# Altium PCB PCB.PcbDoc
Units mm, origin at the board's own origin, x right, y up, seen from the top; angles counter-clockwise.
Board outline 54.8 x 26.13 mm, 2 copper layers (Top Layer, Bottom Layer); 70 components, 35 nets, 200 pads, 64 vias.
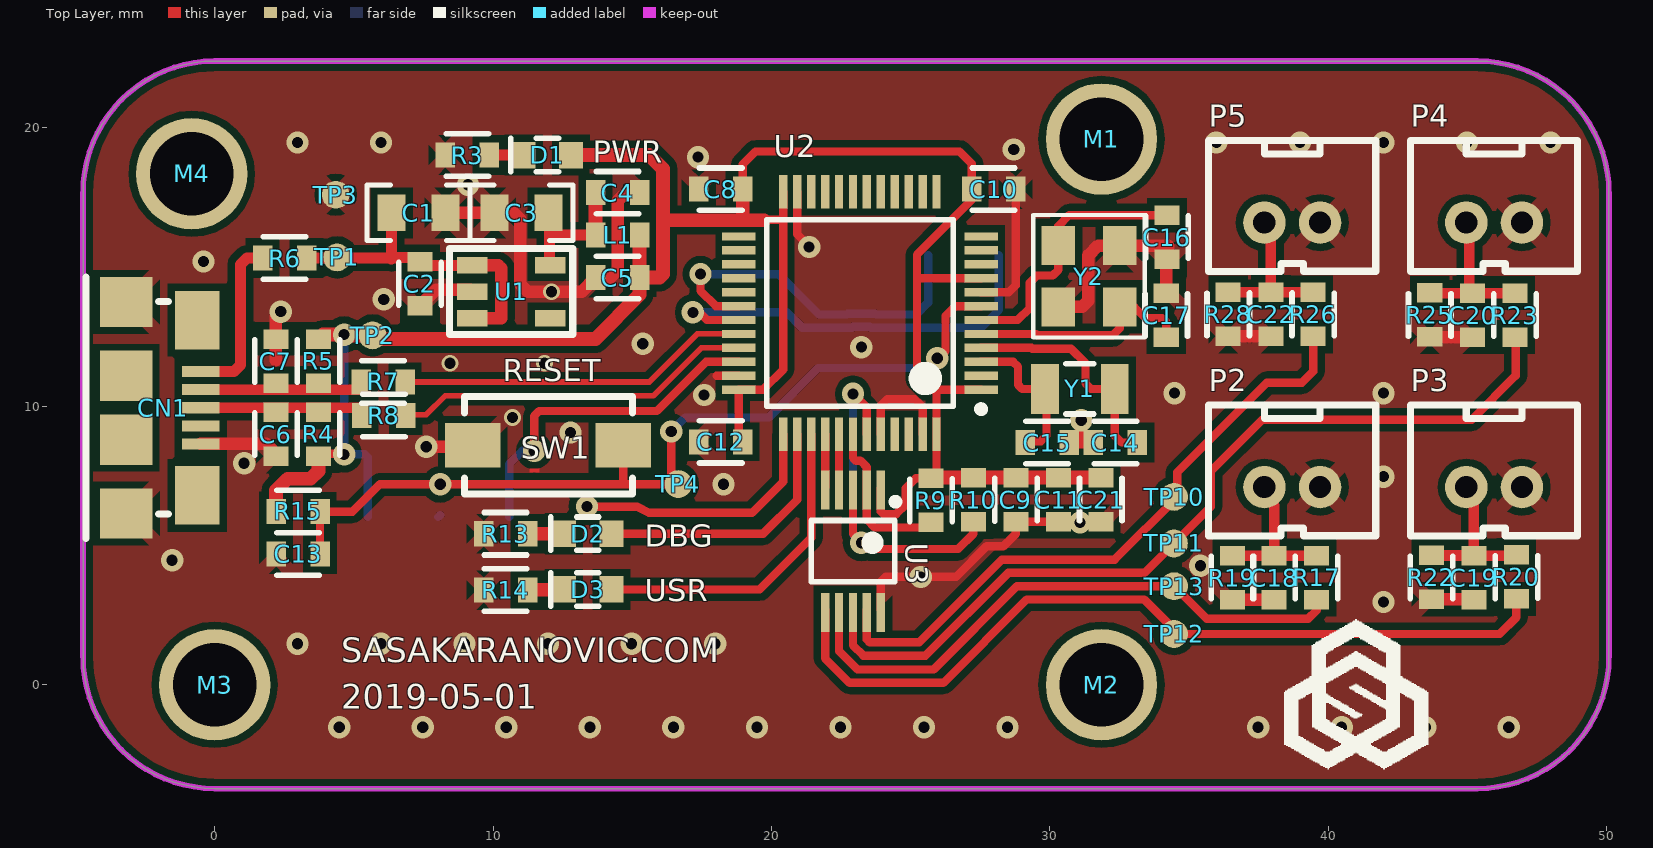
[diagram p0: Top Layer view]
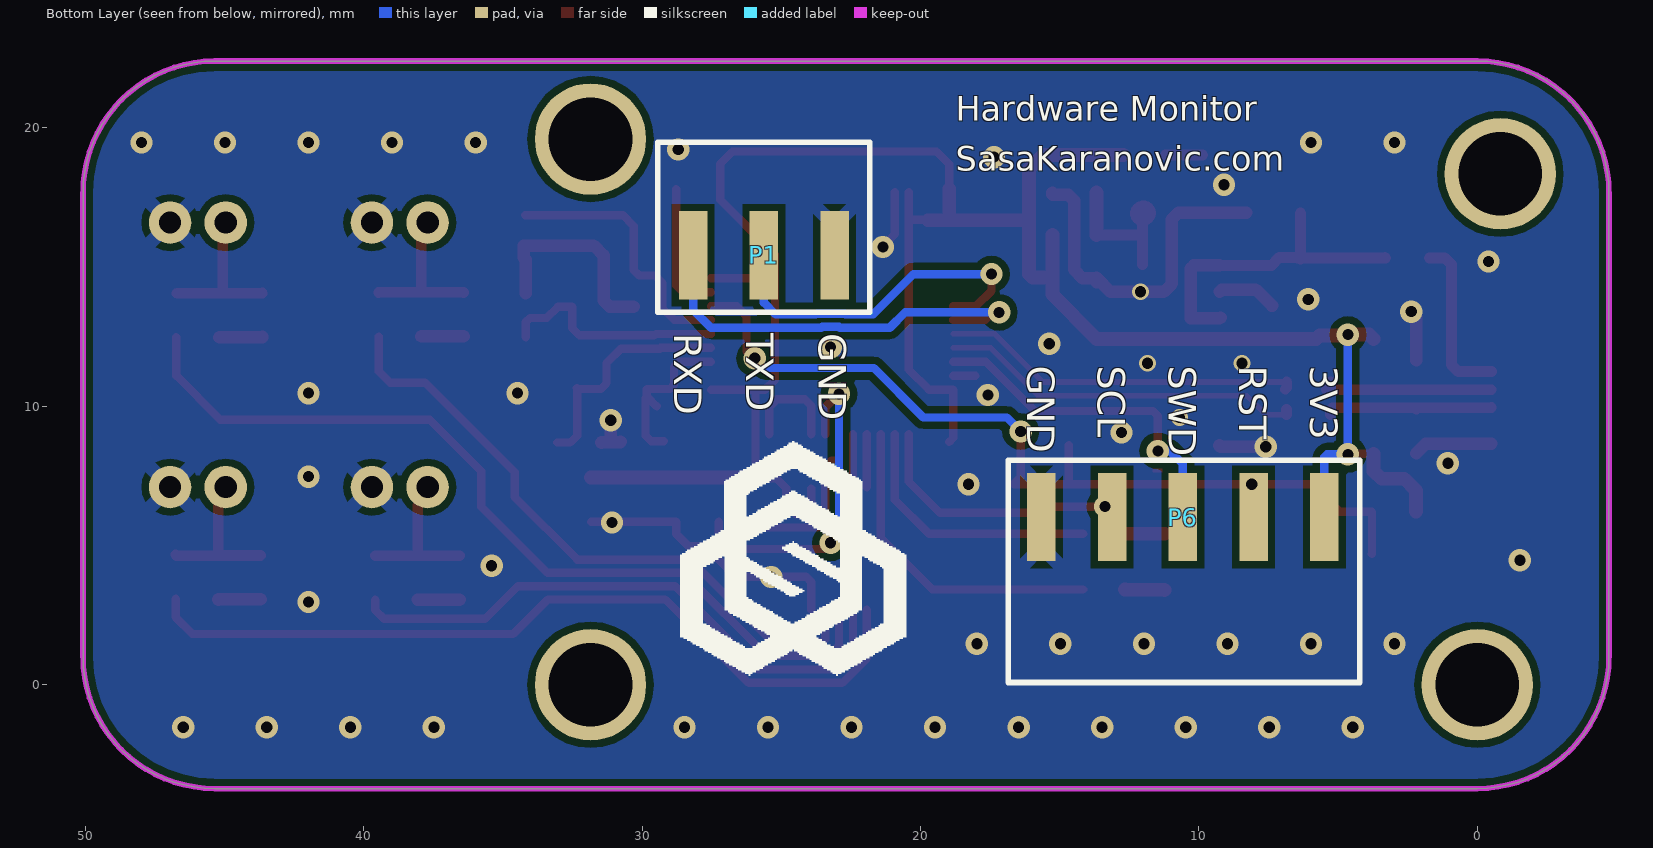
[diagram p1: Bottom Layer view, seen from below]
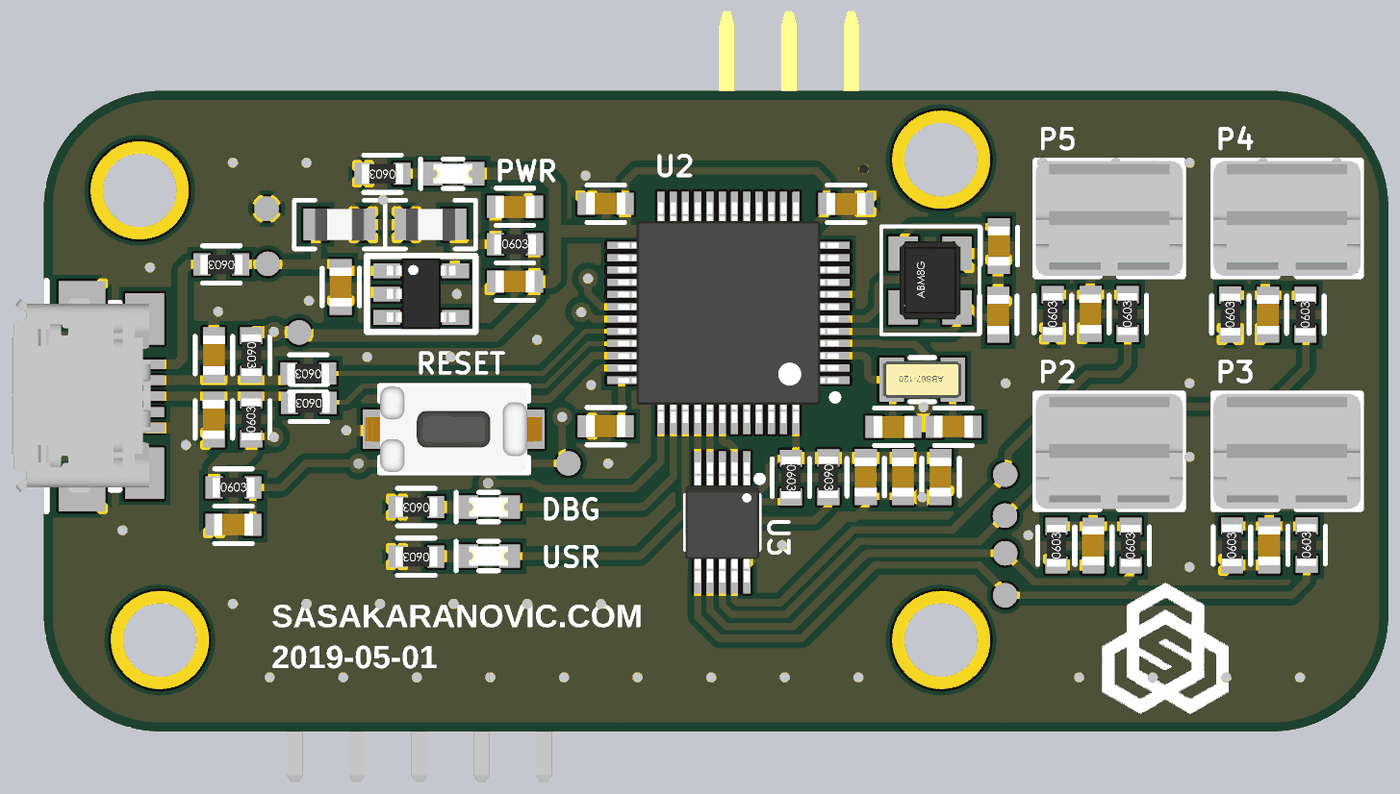
[diagram p2: 3D render of the assembled board from above, using the file's embedded part models]

## Layer stack, top to bottom
Top Solder: solder mask 0.0102, Solder Resist, Dk 3.5
Top Layer: signal copper 0.0356
Dielectric 1: dielectric 0.32, FR-4, Dk 4.8
Bottom Layer: signal copper 0.0356
Bottom Solder: solder mask 0.0102, Solder Resist, Dk 3.5

## Board outline
-4.727,1 -4.727,17.675 cw(c0,17.675) 0,22.402 45.348,22.402 cw(c45.348,17.675) 50.075,17.675 50.075,1 cw(c45.348,1) 45.348,-3.727 0,-3.727 cw(c0,1)

## Design rules (kind name [scope] priority, off if disabled: settings)
AssemblyTestPointUsage [All] p1 off:
AssemblyTestpoint [All] p1 off: testpointundercomponent=TRUE minsize=1.016 maxsize=2.54 preferedsize=1.524 minholesize=0 maxholesize=1.016 preferedholesize=0.813 testpointgrid=0.025 usegrid=TRUE gridtolerance=0 allowsidetop=TRUE allowsidebottom=TRUE
Clearance Clearance_3 [InNamedPolygon('Top GND')] p1: gap=0.254 ignorepadtopadclearanceinfootprint=FALSE except(0: Arc-Hole Track-Hole SMDPad-Hole THPad-Hole Via-Hole Fill-Hole Poly-Hole Region-Hole Text-Hole)
Clearance Clearance_2 [InNamedPolygon('Bottom GND')] p2: gap=0.254 ignorepadtopadclearanceinfootprint=FALSE except(0: Arc-Hole Track-Hole SMDPad-Hole THPad-Hole Via-Hole Fill-Hole Poly-Hole Region-Hole Text-Hole)
Clearance Clearance_1 [InNamedPolygon('TOP_GND')] p3: gap=0.508 ignorepadtopadclearanceinfootprint=FALSE
Clearance [All] p4: gap=0.178 ignorepadtopadclearanceinfootprint=FALSE
ComponentClearance [All] p1 off: gap=0.254 collisioncheckmode=3 verticalgap=0.254 showdistances=FALSE
DiffPairsRouting [All] p1: maxlimit=0.5 minlimit=0.254 mostfreqgap=0.3 toplayer_minwidth=0.2 toplayer_maxwidth=0.381 toplayer_prefwidth=0.3 bottomlayer_minwidth=0.2 bottomlayer_maxwidth=0.381 bottomlayer_prefwidth=0.3 maxuncoupledlength=12.7
FabricationTestPointUsage [All] p1 off: valid=0 allowmultiple=FALSE
FabricationTestpoint [All] p1 off: side=3 testpointundercomponent=TRUE minsize=1.016 maxsize=2.54 preferedsize=1.524 minholesize=0 maxholesize=1.016 preferedholesize=0.813 testpointgrid=0.025 allowsidetop=TRUE allowsidebottom=TRUE usegrid=TRUE gridtolerance=0
FanoutControl Fanout_BGA [IsBGA] p1 off: bgadir=Out bgaviamode=Centered fanoutstyle=Auto fanoutdirection=Alternating viagrid=0.025 // Fanout_BGA (Default Rule)
FanoutControl Fanout_LCC [IsLCC] p2 off: bgadir=Out bgaviamode=Centered fanoutstyle=Auto fanoutdirection=Alternating viagrid=0.025 // Fanout_LCC (Default Rule)
FanoutControl Fanout_SOIC [IsSOIC] p3 off: bgadir=Out bgaviamode=Centered fanoutstyle=Auto fanoutdirection=Alternating viagrid=0.025 // Fanout_SOIC (Default Rule)
FanoutControl Fanout_Small [(CompPinCount < 5)] p4 off: bgadir=Out bgaviamode=Centered fanoutstyle=Auto fanoutdirection=OutThenIn viagrid=0.025 // Fanout_Small (Default Rule)
FanoutControl Fanout_Default [All] p5 off: bgadir=Out bgaviamode=Centered fanoutstyle=Auto fanoutdirection=Alternating viagrid=0.025 // Fanout_Default (Default Rule)
Height [All] p1 off: minheight=0 maxheight=25.4 prefheight=12.7
HoleSize [All] p1: absolutevalues=TRUE maxlimit=6.3 minlimit=0.3 maxpercent=80.000 minpercent=20.000
MinimumSolderMaskSliver [All] p1 off: minsoldermaskwidth=0.254
NetAntennae [All] p1 off: netantennaetolerance=0
PasteMaskExpansion [All] p1 off: expansion=0
PlaneConnect [All] p1: planeconnectstyle=Direct reliefexpansion=0.508 reliefentries=4 reliefconductorwidth=0.254 reliefairgap=0.254
PolygonConnect [All] p1: thpad.connectstyle=Relief thpad.reliefconductorwidth=0.508 thpad.reliefentries=4 thpad.polygonreliefangle="45 Angle" thpad.airgapwidth=0.254 smdpad.connectstyle=Relief smdpad.reliefconductorwidth=0.508 smdpad.reliefentries=4 smdpad.polygonreliefangle="45 Angle" smdpad.airgapwidth=0.254 via.connectstyle=Direct via.reliefconductorwidth=0.508 via.reliefentries=4 via.polygonreliefangle="45 Angle" via.airgapwidth=0.254
RoutingVias [All] p1: holewidth=0.4 width=0.6 viastyle="Through Hole" minholewidth=0.4 minwidth=0.6 maxholewidth=10 maxwidth=10
SilkToSilkClearance [All] p1 off: silktosilkclearance=0.254
SilkToSolderMaskClearance [IsPad] p1 off: minsilkscreentomaskgap=0.254 clearancetoexposedcopper=TRUE
SolderMaskExpansion [All] p1 off: expansion=0.102
Width [All] p1: maxlimit=50 minlimit=0.2 preferedwidth=0.35
11 further rules are at their usual default settings.

## Classes and differential pairs
differential pair UIN: +UIN_P -UIN_N
differential pair USB: +USB_P -USB_N

## Components (designator, comment, footprint, x,y, rotation, side; value= is the part's Value field where it differs from the comment)
C1 "Cap" 0805 7.325,16.95 r180 top value=47uF
C2 "Cap" "0603 - CAP" 7.375,14.404 r90 top value=100n
C3 "Cap" 0805 11.025,16.95 r0 top value=47uF
C4 "Cap" "0603 - CAP" 14.475,17.675 r180 top value=100n
C5 "Cap" "0603 - CAP" 14.475,14.625 r0 top value=100n
C6 "Cap" "0603 - CAP" 2.2,9 r90 top value=DNP
C7 "Cap" "0603 - CAP" 2.2,11.625 r270 top value=DNP
C8 "Cap" "0603 - CAP" 18.175,17.8 r0 top value=100n
C9 "Cap" "0603 - CAP" 28.775,6.65 r90 top value=100n
C10 "Cap" "0603 - CAP" 27.975,17.8 r180 top value=100n
C11 "Cap" "0603 - CAP" 30.3,6.65 r90 top value=100n
C12 "Cap" "0603 - CAP" 18.175,8.725 r0 top value=100n
C13 "Cap" "0603 - CAP" 3,4.7 r0 top value=100n
C14 "Cap" "0603 - CAP" 32.35,8.7 r0 top value=1n
C15 "Cap" "0603 - CAP" 29.9,8.7 r180 top value=1n
C16 "Cap" "0603 - CAP" 34.2,16.075 r270 top value=1n
C17 "Cap" "0603 - CAP" 34.175,13.275 r90 top value=1n
C18 "Cap" "0603 - CAP" 38.05,3.85 r90 top value=1n
C19 "Cap" "0603 - CAP" 45.225,3.85 r90 top value=1n
C20 "Cap" "0603 - CAP" 45.175,13.275 r90 top value=1n
C21 "Cap" "0603 - CAP" 31.825,6.65 r90 top value=100n
C22 "Cap" "0603 - CAP" 37.935,13.307 r90 top value=1n
CN1 "USB Connector" "Amphenol FCI 10118192-0001LF" -3.175,9.95 r270 top
D1 "LED" "0603 DIODE" 11.95,19.025 r180 top
D2 "LED" "0603 DIODE" 13.4,5.425 r180 top
D3 "LED" "0603 DIODE" 13.4,3.425 r180 top
L1 "Inductor" 0603 14.475,16.15 r0 top value=220R@100MHz
M1 "Mounting Hole" "Mounting Hole" 31.85,19.6 r0 top
M2 "Mounting Hole" "Mounting Hole" 31.85,0 r0 top
M3 "Mounting Hole" "Mounting Hole" 0,0 r0 top
M4 "Mounting Hole" "Mounting Hole" -0.825,18.35 r0 top
P1 "USART DBG" "Header 3x1 SMD" 28.165,15.425 r180 bottom
P2 "440054-2" HEADER-2mm-2Pos 38.7,7.1 r0 top
P3 "440054-2" HEADER-2mm-2Pos 45.95,7.1 r0 top
P4 "440054-2" HEADER-2mm-2Pos 45.95,16.6 r0 top
P5 "440054-2" HEADER-2mm-2Pos 38.7,16.6 r0 top
P6 "SWD" "Header 5x1 SMD" 5.495,6.025 r0 bottom
R3 "Res" 0603 9.075,19.025 r180 top value=470R
R4 "Res" 0603 3.725,9 r90 top value=DNP
R5 "Res" 0603 3.725,11.625 r270 top value=DNP
R6 "Res" 0603 2.51,15.325 r180 top value=0R
R7 "Res" 0603 6.05,10.875 r180 top value=0R
R8 "Res" 0603 6.075,9.675 r180 top value=0R
R9 "Res" 0603 25.725,6.625 r270 top value=4K7
R10 "Res" 0603 27.25,6.64 r270 top value=4K7
R13 "Res" 0603 10.45,5.425 r180 top value=0R
R14 "Res" 0603 10.45,3.4 r180 top value=0R
R15 "Res" 0603 3,6.225 r0 top value=4K7
R17 "Res" 0603 39.575,3.85 r90 top value=1K
R19 "Res" 0603 36.55,3.85 r90 top value=100K
R20 "Res" 0603 46.75,3.875 r90 top value=1K
R22 "Res" 0603 43.7,3.86 r90 top value=100K
R23 "Res" 0603 46.7,13.275 r90 top value=1K
R25 "Res" 0603 43.638,13.282 r90 top value=100K
R26 "Res" 0603 39.45,13.3 r90 top value=1K
R28 "Res" 0603 36.4,13.3 r90 top value=100K
SW1 "Switch" EVQ-5PN04K 11.975,8.6 r180 top
TP1 "Test Point 0.6mm" TP_SMD_1mm 4.4,15.35 r90 top
TP2 "Test Point 0.6mm" TP_SMD_1mm 5.675,12.55 r90 top
TP3 "Test Point 0.6mm" TP_SMD_1mm 4.35,17.6 r90 top
TP4 "Test Point 0.6mm" TP_SMD_1mm 16.65,7.207 r180 top
TP10 "Test Point 0.6mm" TP_SMD_1mm 34.458,6.75 r180 top
TP11 "Test Point 0.6mm" TP_SMD_1mm 34.45,5.075 r180 top
TP12 "Test Point 0.6mm" TP_SMD_1mm 34.458,1.825 r180 top
TP13 "Test Point 0.6mm" TP_SMD_1mm 34.458,3.542 r180 top
U1 "AP2127K-3.3" SOT-23-5 10.65,14.125 r0 top
U2 "IC MCU 32BIT 64KB FLASH 48LQFP" LQFP48_7x7mm 23.175,13.35 r180 top
U3 "MCP4728" TSSOP50P490X110-10N 22.925,4.8 r270 top
Y1 "32.768Hz" ABS07-120 31.075,10.625 r180 top
Y2 "8MHz" ABM8G 31.4,14.675 r90 top

## Footprints (in the part's own frame and the unit in brackets; to place one, negate y for a bottom-side part, rotate by r counter-clockwise, add the part's x,y. Pads: shape width x height; smd on the part's side, far side on the other; paste and mask are expansions set on the pad)
0603 [mm]
  rect 0.7x0.9 smd: 1(-0.79,0) 2(0.79,0)
  silkscreen extent -0.76,-0.76 0.76,0.76, body extent -0.85,-0.4 0.85,0.4, height 0.56
"0603 - CAP" [mm]
  rect 0.7x0.9 smd: 1(-0.79,0) 2(0.79,0)
  silkscreen extent -0.76,-0.76 0.76,0.76, body extent -0.8,-0.44 0.8,0.46, height 0.8
"0603 DIODE" [mm] "0603 Package for Diode"
  rect 0.85x0.95 smd: A(-0.85,0) K(0.85,0)
  silkscreen extent -0.4,-0.6 1.32,0.6, body extent -0.8,-0.4 0.8,0.4, height 0.7
0805 [mm]
  rect 1x1.3 smd: 1(-0.97,0) 2(0.97,0)
  silkscreen extent -1.85,-0.99 1.85,0.99, body extent -1,-0.65 1,0.66, height 0.73
ABM8G [mm]
  rect 1.4x1.2 smd: 1(-1.1,-1.1) 2(1.1,-1.1) 3(1.1,1.1) 4(-1.1,1.1)
  silkscreen extent -2.2,-2 2.2,2, body extent -3.1,-1.25 1.6,1.25, height 7.01
ABS07-120 [mm] "0.126\" L x 0.061\" W (3.20mm x 1.50mm)"
  rect 1x1.8 smd: 1(-1.25,0) 2(1.25,0)
  silkscreen extent -0.5,-0.9 0.5,0.9, body extent -1.6,-0.75 1.6,0.75, height 0.89
"Amphenol FCI 10118192-0001LF" [mm]
  rect 0.4x1.35 smd: 1(-1.3,2.675) 2(-0.65,2.675) 3(0,2.675) 4(0.65,2.675) 5(1.3,2.675)
  rect 1.8x1.9 smd: 6(-3.8,0) 7(3.8,0) ""(-1.15,0) ""(1.15,0)
  rect 2.1x1.6 smd: ""(-3.15,2.55) ""(3.15,2.55)
  silkscreen extent -4.7,-1.45 4.7,1.52, body extent -3.98,-2.87 3.93,2.79, height 3.09
EVQ-5PN04K [mm]
  rect 2x1.6 smd: 1(-2.7,0) 2(2.7,0)
  silkscreen extent -3.03,-1.75 3,1.75, body extent -3.6,-1.75 3.6,1.75, height 5.1
"Header 3x1 SMD" [mm] "Connector; Header; 3 Position"
  rect 1.02x3.17 smd: 1(0,0) 2(2.54,0) 3(5.08,0)
  silkscreen extent -1.27,-2.04 6.35,4.06, body extent -1.3,-1.27 6.32,10.22
"Header 5x1 SMD" [mm] "Connector; Header; 5 Position"
  rect 1.02x3.17 smd: 1(0,0) 2(2.54,0) 3(5.08,0) 4(7.62,0) 5(10.16,0)
  silkscreen extent -1.27,-2.04 11.35,5.94, body extent -1.27,-1.4 11.43,11.84
HEADER-2mm-2Pos [mm] "CONN HEADER VERT 2POS 2MM"
  round 1.524 hole 0.8: 1(-1,0) 2(1,0)
  silkscreen extent -3,-1.75 3,2.95, body extent -3,-1.75 3,2.95, height 6.1
LQFP48_7x7mm [mm] "TSQFP, 48-Leads, Body 7.50x7.50mm, Pitch 0.50mm, IPC Medium Density"
  rect 1.2x0.3 smd: 1(-4.35,2.75) 2(-4.35,2.25) 3(-4.35,1.75) 4(-4.35,1.25) 5(-4.35,0.75) 6(-4.35,0.25) 7(-4.35,-0.25) 8(-4.35,-0.75) 9(-4.35,-1.25) 10(-4.35,-1.75) 11(-4.35,-2.25) 12(-4.35,-2.75) 25(4.35,-2.75) 26(4.35,-2.25) 27(4.35,-1.75) 28(4.35,-1.25) 29(4.35,-0.75) 30(4.35,-0.25) 31(4.35,0.25) 32(4.35,0.75) 33(4.35,1.25) 34(4.35,1.75) 35(4.35,2.25) 36(4.35,2.75)
  rect 0.3x1.2 smd: 13(-2.75,-4.35) 14(-2.25,-4.35) 15(-1.75,-4.35) 16(-1.25,-4.35) 17(-0.75,-4.35) 18(-0.25,-4.35) 19(0.25,-4.35) 20(0.75,-4.35) 21(1.25,-4.35) 22(1.75,-4.35) 23(2.25,-4.35) 24(2.75,-4.35) 37(2.75,4.35) 38(2.25,4.35) 39(1.75,4.35) 40(1.25,4.35) 41(0.75,4.35) 42(0.25,4.35) 43(-0.25,4.35) 44(-0.75,4.35) 45(-1.25,4.35) 46(-1.75,4.35) 47(-2.25,4.35) 48(-2.75,4.35)
  silkscreen extent -4.47,-3.35 3.35,3.57, body extent -4.5,-4.5 4.5,4.5, height 1.6
"Mounting Hole" [mm] "PCB Mounting Hole"
  round 4 hole 3: 0(0,0)
  Mechanical 13 keep-out circle w0.254: c0,0 r3
SOT-23-5 [mm]
  rect 1.1x0.6 smd: 1(-1.4,0.94) 2(-1.4,-0.01) 3(-1.4,-0.96) 4(1.4,-0.96) 5(1.4,0.94)
  silkscreen extent -2.21,-1.55 2.21,1.55, body extent -1.4,-1.45 1.4,1.45
TP_SMD_1mm [mm]
  round 1 smd: 1(0,0)
TSSOP50P490X110-10N [mm] "TSSOP, 10-Leads, Body 3.00x3.00mm, Pitch 0.50mm, IPC Medium Density"
  rect 1.4x0.3 smd: 1(-2.2,1) 2(-2.2,0.5) 3(-2.2,0) 4(-2.2,-0.5) 5(-2.2,-1) 6(2.2,-1) 7(2.2,-0.5) 8(2.2,0) 9(2.2,0.5) 10(2.2,1)
  silkscreen extent -1.9,-1.5 1.1,1.65, body extent -2.45,-1.5 2.45,1.5, height 1.1

## Part data
C1 C3: "CAP TANT POLY47UF 20% 16V 1210", Distributor Part Number=478-9595-1-ND, Manufacturer="AVX Corporation", Manufacturer Part Number=TCNT476M016R0200A, Distributor=DigiKey
C2 C4 C5 C6 C7 C13: "Capacitor", Distributor Part Number=478-5052-1-ND, Manufacturer="AVX Corporation", Manufacturer Part Number=06035C104KAT2A, Distributor=DigiKey
C8 C9 C10 C11 C12 C14 C15 C16 C17 C18 C19 C20 C21 C22: "Capacitor"
CN1: library part "Amphenol FCI 10118192-0001LF", "CONN USB MICRO B RECPT SMT R/A", Manufacturer="Amphenol FCI", Manufacturer PN=10118192-0001LF, ComponentLink1Description=Datasheet, ComponentLink1URL=http://cdn.amphenol-icc.com/media/wysiwyg/files/drawing/10118192.pdf, Distributor=DigiKey, Distributor PN=609-4613-1-ND
D1 D2 D3: "Typical RED GaAs LED", LatestRevisionDate=08-Jul-2005, LatestRevisionNote="Mech Layer 1 removed.", PackageDescription="LED; 2 Leads", PackageReference=LED-1, Published=8-Jun-2000, Publisher="Altium Limited"
L1: "FERRITE BEAD 220 OHM 0603 1LN", Distributor Part Number=490-5255-1-ND, Manufacturer="Murata Electronics North America", Manufacturer Part Number=BLM18KG221SN1D, Distributor=DigiKey
M1 M2 M3 M4: "Board Mounting Hole"
P1: library part "Header 3", "Header, 3-Pin", LatestRevisionDate=17-Jul-2002, LatestRevisionNote="Re-released for DXP Platform.", Publisher="Altium Limited"
P2 P3 P4 P5: "CONN HEADER VERT 2POS 2MM", Manufacturer="TE Connectivity AMP Connectors", Distributor=DigiKey, Manufacturer Part Number=440054-2, Parameter 3=A100034-ND
P6: library part "Header 5", "Header, 5-Pin", LatestRevisionDate=17-Jul-2002, LatestRevisionNote="Re-released for DXP Platform.", Publisher="Altium Limited"
R3 R4 R5 R6 R7 R8 R9 R10 R13 R14 R15: "Resistor", Distributor Part Number=311-0.0GRCT-ND, Manufacturer=Yageo, Manufacturer Part Number=RC0603JR-070RL, Distributor=DigiKey
R17 R19 R20 R22 R23 R25 R26 R28: "Resistor", LatestRevisionDate=17-Jul-2002, LatestRevisionNote="Re-released for DXP Platform.", PackageDescription="Axial Device, Thru-Hole; 2 Leads; 0.3 in Pin Spacing", PackageReference=AXIAL-0.3, Published=8-Jun-2000, Publisher="Altium Limited"
SW1: library part EVQ-5PN04K, "SWITCH TACTILE SPST-NO 0.05A 12V", Distributor Part Number=P13595SCT-ND, Manufacturer="Panasonic Electronic Components", Distributor=DigiKey, Manufacturer Part Number=EVQ-5PN04K
TP1 TP2 TP3 TP4 TP10 TP11 TP12 TP13: library part TP
U1: library part AP2127K-3.3TRG1, "IC REG LINEAR 3.3V 300MA SOT23-5", Distributor Part Number=AP2127K-3.3TRG1DICT-ND, Manufacturer="Diodes Incorporated", Distributor=DigiKey, Manufacturer Part Number=AP2127K-3.3TRG1
U2: library part STM32F103C8T6, Distributor Part Number=497-6063-ND, Manufacturer=STMicroelectronics, ComponentLink1Description="DigiKey URL", ComponentLink1URL=https://www.digikey.ca/product-detail/en/stmicroelectronics/STM32F103C8T6/497-6063-ND/1646338, ComponentLink2Description=Datasheet, ComponentLink2URL=http://www.st.com/content/ccc/resource/technical/document/datasheet/33/d4/6f/1d/df/0b/4c/6d/CD00161566.pdf/files/CD00161566.pdf/jcr:content/translations/en.CD00161566.pdf, Distributor=DigiKey, Manufacturer Part Number=STM32F103C8T6
U3: "IC DAC 12BIT W/I2C 10-MSOP", Distributor Part Number=MCP4728T-E/UNCT-ND, Manufacturer="Microchip Technology", Manufacturer Part Number=MCP4728T-E/UN, Distributor=DigiKey
Y1: library part ABS07-120-32.768KHZ-T, "CRYSTAL 32.7680KHZ 6PF SMD", Distributor Part Number=535-11937-1-ND, Manufacturer="Abracon LLC", Distributor=DigiKey, Manufacturer Part Number=ABS07-120-32.768KHZ-T
Y2: library part ABM8G, "CRYSTAL 16.0000MHZ 10PF SMD", Distributor Part Number=535-10907-1-ND, Manufacturer="Abracon LLC", Manufacturer Part Number=ABM8G-16.000MHZ-4Y-T3, ComponentLink1Description=DigiKey, ComponentLink1URL=https://www.digikey.ca/products/en?keywords=535-10907-1-ND, ComponentLink2Description=Datasheet, ComponentLink2URL=https://www.abracon.com/Resonators/ABM8G.pdf, Distributor=DigiKey

## Via types
v1: diameter 0.8, hole 0.4, Top Layer to Bottom Layer, tented both sides, 60 vias
v2: diameter 0.6, hole 0.4, Top Layer to Bottom Layer, tented both sides, 4 vias

## Nets (pads, with @x,y where several pads share a name; then routed paths per layer and width w, separated by ;. In a path a pad name is that pad's centre, name@x,y a point inside that pad or via, vN(x,y) a via of type N, cw(c..) or ccw(c..) an arc to the next point about the centre after c; other vN are vias at no path point)
3V3: C5.2 C8.2 C9.2 C10.2 C11.2 C12.2 C21.2 D1.A L1.2 P6.1 R4.1 R5.1 R9.1 R10.1 R15.1 TP2.1 U2.1 U2.9 U2.24 U2.36 U2.48 U3.1 | length 85.6
  Top Layer w0.3: R4.1@3.725,8.293 R4.1@3.743,8.293 ; R4.1@3.725,8.31 R4.1@3.743,8.293 ; v1(4.65,8.275) 4.632,8.293 R4.1@3.743,8.293 ; C12.2 18.825,8.865 U2.36 19.699,10.6 20.425,11.326 20.425,16.7 ; C8.2 18.965,18.69 19.425,19.15 26.75,19.15 27.185,18.715 C10.2 27.185,17.41 25.222,15.447 25.222,14.6 ; 19.722,16.684 19.738,16.7 20.425,16.7 ; U2.24 20.425,16.7 ; U3.1@23.925,7.05 U3.1 23.925,6.225 24.022,6.128 24.478,6.128 24.825,6.475 24.825,7.065 25.175,7.415 R9.1 25.75,7.44 25.925,7.615 U2.48 25.925,10.6 ; U2.1 25.925,10.6 ; U2.9 25.3,14.6 25.222,14.6 ; 25.222,14.6 25.222,10.953 25.575,10.6 25.925,10.6
  Top Layer w0.5: R15.1 2.21,6.985 2.625,7.4 3.45,7.4 3.725,7.675 R4.1 R4.1@3.725,8.293 ; R5.1 3.885,12.575 v1(4.65,12.575) 4.675,12.55 TP2.1 5.8,12.425 13.675,12.425 15.265,14.015 C5.2 ; D1.A@12.7,19.025 D1.A 15.6,19.025 16.1,18.525 16.1,16.7 ; L1.2 C5.2 ; C8.2 18.965,16.699 18.95,16.684 ; 19.722,16.684 18.95,16.684 ; R9.1@25.75,7.44 C9.2@28.8,7.44 ; C9.2 C21.2 ; C5.2 15.975,14.625 16.1,14.75 16.1,16.7 ; 16.1,16.7 16.116,16.684 18.95,16.684
  Bottom Layer w0.3: v1(4.65,12.575) v1(4.65,8.275) 5.4,8.275 5.495,8.18 P6.1
CHA: R17.1 TP13.1 U3.7 | length 21.1
  Top Layer w0.3: U3.7@22.425,2.7 22.425,1.211 23.086,0.55 25.825,0.55 28.817,3.542 TP13.1 35.625,2.375 39.275,2.375 39.575,2.675 R17.1
CHB: R20.1 TP12.1 U3.6 | length 29.6
  Top Layer w0.3: U3.6@21.925,2.7 21.925,0.95 22.803,0.072 26.172,0.072 29.164,3.064 33.386,3.064 34.625,1.825 46.15,1.825 46.75,2.425 R20.1
CHC: R23.1 TP11.1 U3.8 | length 31.5
  Top Layer w0.3: U3.8@22.925,2.7 22.925,1.418 23.296,1.047 25.529,1.047 28.502,4.019 33.394,4.019 TP11.1 35.775,6.4 35.775,7.675 37.625,9.525 45.15,9.525 46.725,11.1 R23.1@46.725,12.485
CHD: R26.1 TP10.1 U3.9 | length 22.9
  Top Layer w0.3: U3.9@23.425,2.7 23.425,1.625 23.525,1.525 25.3,1.525 28.272,4.497 32.322,4.497 34.575,6.75 34.575,7.635 37.79,10.85 39.05,10.85 39.45,11.25 R26.1
GND: C1.1 C2.1 C3.1 C4.1 C5.1 C6.1 C7.1 C8.1 C9.1 C10.1 C11.1 C12.1 C13.1 C14.1 C15.1 C16.2 C17.2 C18.1 C19.1 C20.1 C21.1 C22.1 CN1.5 CN1.6 CN1.7 P1.3 P2.2 P3.2 P4.2 P5.2 P6.5 R3.2 R13.2 R14.2 R19.1 R22.1 R25.1 R28.1 SW1.2 TP3.1 U1.2 U2.8 U2.23 U2.35 U2.44 U2.47 U3.10 Y2.2 Y2.4 | length 57.8
  Top Layer w0.3: 18.025,11.1 U2.35 ; U2.23 20.925,16.175 v1@21.362,15.738 ; U3.10@23.925,2.7 23.925,3.7 24.1,3.875 26.625,3.875 27.725,4.975 28.325,4.975 28.775,5.425 C9.1 C21.1 ; U2.44 23.925,10.025 24.15,10.25 25.154,10.25 25.425,9.979 U2.47 ; U2.8 28.525,14.1 28.765,14.34 C10.1
  Top Layer w0.45: CN1.5 1.86,8.65 C6.1@2.2,8.31 ; 2.2,11.65 C7.1 2.2,13.225 v1(2.375,13.4) ; C2.1 7.951,14.19 9.175,14.19 U1.2 ; v1(7.6,8.55) 9.225,8.55 SW1.2 ; C1.1 C3.1 10.75,16.95 10.975,16.725 10.975,14.4 11.26,14.115 v2(12.1,14.115) 13.175,14.115 C5.1 ; C5.1@13.66,14.45 13.685,14.475 C5.1 ; C4.1 15.265,17.625 15.24,17.6 14.7,17.6 14.475,17.375 14.475,14.9 14.175,14.6 13.71,14.6 C5.1 ; Y2.4 31.15,13.575 31.375,13.8 31.375,15.425 31.725,15.775 Y2.2 34.25,15.775 34.25,15.335 C16.2 34.175,15.26 C17.2 ; C15.1@30.765,8.725 30.777,8.712 31.1,8.712 ; v1(31.121,9.5) 31.121,8.734 31.1,8.712 ; C14.1@31.46,8.7 31.447,8.712 31.1,8.712 ; R28.1 36.403,12.513 37.932,12.513 C22.1 ; R19.1 C18.1 ; R25.1 43.641,12.488 45.172,12.488 C20.1 ; R22.1 43.705,3.065 45.22,3.065 C19.1
  other v1: 4.475,-1.525 7.475,-1.525 10.475,-1.525 13.475,-1.525 16.475,-1.525 19.475,-1.525 22.475,-1.525 25.475,-1.525 28.475,-1.525 37.475,-1.525 40.475,-1.525 43.475,-1.525 46.475,-1.525 2.975,1.475 5.975,1.475 8.975,1.475 11.975,1.475 14.975,1.475 17.975,1.475 41.975,2.975 25.363,3.875 35.4,4.275 -1.525,4.475 31.075,5.825 18.275,7.2 41.975,7.475 1.059,7.956 12.781,9.057 17.579,10.405 34.475,10.475 41.975,10.475 23.225,12.125 15.375,12.25 6.075,13.841 -0.401,15.2 21.35,15.725 9.1,17.959 17.357,18.95 28.7,19.225 2.975,19.475 5.975,19.475 35.975,19.475 38.975,19.475 41.975,19.475 44.975,19.475 47.975,19.475
  other v2: 10.7,9.6 8.45,11.55 11.85,11.55
I2C1_SCL: R9.2 U2.42 U3.2 | length 6
  Top Layer w0.3: U2.42 22.925,8.15 23.025,8.05 23.189,8.05 23.425,7.814 U3.2 ; U3.2@23.425,7.1 23.425,5.929 23.704,5.65 25.54,5.65 R9.2
I2C1_SDA: R10.2 U2.43 U3.3 | length 14
  Top Layer w0.3: U3.3@22.925,7.1 22.925,5.425 23.475,4.875 26.7,4.875 27.25,5.425 R10.2 ; v1(22.925,10.45) 23.425,9.95 U2.43
  Bottom Layer w0.3: v1(22.925,10.45) 22.925,5.4 v1(23.225,5.1)
LED_DEBUG: D2.A U2.38 | length 9.6
  Top Layer w0.3: D2.A@14.15,5.425 D2.A 19.7,5.425 20.925,6.65 U2.38
LED_USER: D3.A U2.39 | length 11.8
  Top Layer w0.3: D3.A@14.15,3.425 D3.A 19.575,3.425 21.425,5.275 U2.39
NetC3_2: C3.2 C4.2 L1.1 U1.5 | length 5.1
  Top Layer w0.4: U1.5@12.023,15.092 12.023,16.175 ; C3.2@12.023,16.922 12.023,16.175 ; L1.1 12.048,16.15 12.023,16.175
  Top Layer w0.5: L1.1 C4.2
  Top Layer w0.9: C3.2 C3.2@12.023,16.922
NetC14_2: C14.2 U2.4 Y1.1 | length 8.4
  Top Layer w0.3: U2.4 29.336,12.1 29.366,12.069 30.756,12.069 31.275,11.55 31.275,10.825 31.475,10.625 Y1.1 ; Y1.1@32.35,10.65 Y1.1 ; C14.2@33.04,8.7 32.575,8.7 32.325,8.95 Y1.1
NetC15_2: C15.2 U2.3 Y1.2 | length 6
  Top Layer w0.3: U2.3 28.675,11.6 28.85,11.425 28.85,10.775 29,10.625 Y1.2 Y1.2@29.825,10.35 ; C15.2@29.21,8.75 29.675,8.75 29.875,8.95 29.875,10.3 Y1.2@29.825,10.35 ; Y1.2@29.475,10 Y1.2@29.825,10.35
NetC16_1: C16.1 U2.6 Y2.3 | length 9.7
  Top Layer w0.3: U2.6 28.839,13.1 29.275,13.536 29.275,14.441 29.534,14.7 30.1,14.7 30.3,14.9 Y2.3 30.3,16.475 30.69,16.865 C16.1
NetC17_1: C17.1 U2.5 Y2.1 | length 8.3
  Top Layer w0.3: U2.5 29.511,12.6 29.564,12.547 32.247,12.547 32.5,12.8 Y2.1 33.025,13.575 33.425,13.175 34.025,13.175 34.175,13.025 C17.1
NetC18_2: C18.2 P2.1 R17.2 R19.2 | length 5.6
  Top Layer w0.381: R19.2 C18.2 ; P2.1 37.7,6.791 38.05,6.441 C18.2 ; R17.2 C18.2
NetC19_2: C19.2 P3.1 R20.2 R22.2 | length 5.6
  Top Layer w0.381: R22.2 43.705,4.645 45.22,4.645 C19.2 ; P3.1 44.95,6.791 45.225,6.516 C19.2 ; R20.2 46.725,4.64 C19.2
NetC20_2: C20.2 P4.1 R23.2 R25.2 | length 5.7
  Top Layer w0.381: R25.2 43.641,14.068 C20.2@45.119,14.068 ; P4.1 45.063,16.487 45.063,14.124 C20.2@45.119,14.068 ; R23.2 C20.2 45.122,14.065 C20.2@45.119,14.068
NetC22_2: C22.2 P5.1 R26.2 R28.2 | length 5.7
  Top Layer w0.381: R28.2 36.403,14.093 37.932,14.093 C22.2 ; P5.1 37.7,16.291 37.935,16.056 C22.2 ; R26.2 39.443,14.097 C22.2
NetCN1_1: CN1.1 R6.2 | length 6
  Top Layer w0.4: CN1.1 0.691,11.25 0.925,11.484 0.925,15.091 1.159,15.325 R6.2
NetD1_K: D1.K R3.1 | length 1.3
  Top Layer w0.4: R3.1 D1.K D1.K@11.2,19.025
NetD2_K: D2.K R13.1 | length 1.4
  Top Layer w0.5: R13.1 D2.K D2.K@12.65,5.425
NetD3_K: D3.K R14.1 | length 1.4
  Top Layer w0.5: R14.1 11.24,3.413 12.637,3.413 D3.K@12.65,3.425
nLDAC: U2.41 U3.4 | length 1.9
  Top Layer w0.3: U3.4@22.425,7.1 U2.41
nRST: C13.2 P6.2 R15.2 SW1.1 TP4.1 U2.7 | length 32
  Top Layer w0.3: C13.2 3.782,4.707 3.782,5.775 3.782,6.217 4.95,6.217 5.94,7.207 14.675,7.207 ; SW1.1 14.675,7.207 ; v1(16.4,9.1) 16.4,7.457 TP4.1 14.675,7.207 ; v1(25.95,11.725) 26,11.725 26.25,11.975 26.25,13.25 26.6,13.6 U2.7
  Bottom Layer w0.3: P6.2 P6.2@8.1,6.09 ; v1(16.4,9.1) 16.9,9.6 19.9,9.6 21.675,11.375 25.6,11.375 v1(25.95,11.725)
  other v1: 8.1,7.2
RDY/nBSY: U2.40 U3.5 | length 1.9
  Top Layer w0.3: U3.5@21.925,7.1 U2.40
SWCLK: P6.4 U2.37 | length 9.5
  Top Layer w0.3: v1(13.375,6.4) 15.175,6.4 15.6,6.175 19.3,6.175 20.425,7.3 U2.37
  Bottom Layer w0.3: P6.4@13.175,6.525 13.3,6.4 v1(13.375,6.4)
SWIO: P6.3 U2.34 | length 12.4
  Top Layer w0.3: v1(11.475,8.4) 11.475,9.65 11.656,9.831 15.879,9.831 17.648,11.6 U2.34
  Bottom Layer w0.3: P6.3 10.575,7.925 11.05,8.4 v1(11.475,8.4)
UIN_N: C7.2 CN1.2 R5.2 R7.2 | length 6.2
  Top Layer w0.381: CN1.2@-0.493,10.593 CN1.2 R7.2@5.425,10.6 ; R7.2@5.201,10.66 5.26,10.719 R7.2
UIN_P: C6.2 CN1.3 R4.2 R8.2 | length 5.9
  Top Layer w0.381: CN1.3@-0.493,9.958 CN1.3 1.315,9.95 C6.2@2.141,9.95 ; C6.2@2.171,9.919 C6.2@2.2,9.89 ; C6.2@2.2,9.95 R8.2@5.216,9.95 ; R8.2@5.216,9.89 5.275,9.831 R8.2@5.275,9.7
USART1_RX: P1.1 U2.31 | length 15.5
  Top Layer w0.3: v1(17.175,13.375) 17.175,13.55 17.2,13.575 17.675,13.1 U2.31
  Bottom Layer w0.3: v1(17.175,13.375) 20.55,13.375 21.103,12.822 22.893,12.822 22.924,12.853 23.526,12.853 23.557,12.822 27.522,12.822 28.165,13.465 P1.1
USART1_TX: P1.2 U2.30 | length 12.9
  Top Layer w0.3: v1(17.45,14.75) 17.45,14.15 18,13.6 U2.30
  Bottom Layer w0.3: v1(17.45,14.75) 20.25,14.75 21.7,13.3 22.695,13.3 22.726,13.331 23.724,13.331 23.755,13.3 25.2,13.3 25.625,13.725 P1.2
USB_N: R7.1 U2.32 | length 13
  Top Layer w0.2: R7.1 15.608,10.875 17.333,12.6 U2.32
  Top Layer w0.381: R7.1 6.84,10.676 R7.1@6.899,10.616
USB_P: R8.1 U2.33 | length 13.2
  Top Layer w0.2: R8.1@6.855,9.7 7.6,9.7 8.275,10.375 15.752,10.375 ; 15.752,10.377 17.475,12.1 U2.33
  Top Layer w0.381: R8.1@6.855,9.7 R8.1@6.855,9.9
VUSB: C1.2 C2.2 R6.1 TP1.1 U1.1 U1.3 | length 11.8
  Top Layer w0.4: R6.1@3.32,15.345 R6.1 6.35,15.325 6.45,15.325 ; C1.2 6.355,15.35 6.35,15.345 7.12,15.345 7.4,15.065 U1.1
  Top Layer w0.45: 6.35,15.325 6.35,15.345 ; U1.3@9.225,13.19 U1.3 10.29,13.165 10.29,14.96 10.185,15.065 U1.1
pads on no net: CN1. CN1.4 M1.0 M2.0 M3.0 M4.0 U1.4 U2.2 U2.10 U2.11 U2.12 U2.13 U2.14 U2.15 U2.16 U2.17 U2.18 U2.19 U2.20 U2.21 U2.22 U2.25 U2.26 U2.27 U2.28 U2.29 U2.45 U2.46

## Polygon pours and split planes (outlines as drawn)
GND on Bottom Layer "Bottom GND" (solid, remove dead copper, pour order 18): -4.727,1 -4.727,17.675 cw(c0,17.675) 0,22.402 45.348,22.402 cw(c45.348,17.675) 50.075,17.675 50.075,1 cw(c45.348,1) 45.348,-3.727 0,-3.727 cw(c0,1)
GND on Top Layer "Top GND" (solid, remove dead copper, pour order 17): -4.727,1 -4.727,17.675 cw(c0,17.675) 0,22.402 45.348,22.402 cw(c45.348,17.675) 50.075,17.675 50.075,1 cw(c45.348,1) 45.348,-3.727 0,-3.727 cw(c0,1)

## Keep-outs
Keep-Out Layer:
  the board outline again, w0.2

## Other copper
Top Layer:
  rectangle net GND: 11.304,7.628 11.675,7.763

## Silkscreen, mask and mechanical layers (free items; w line width, h text height)
Top Overlay:
  region: 305 vertices and 4 holes, not listed, extent 38.405,-3.026 43.577,2.346
  text "PWR" at 13.575,18.75 h0.8
  text "RESET" at 10.35,10.9 h0.8
  text "DBG" at 15.45,4.95 h0.8
  text "USR" at 15.45,3 h0.8
  text "SASAKARANOVIC.COM" at 4.55,0.525 h1.5
  text "2019-05-01" at 4.55,-1.15 h1.5
Bottom Overlay:
  region: 305 vertices and 4 holes, not listed, extent 20.512,0.325 28.622,8.749
  text "Hardware Monitor" at 18.725,19.975 h1.5
  text "SasaKaranovic.com" at 18.725,18.175 h1.5
  text "GND" at 23.65,12.625 h1 r90
  text "TXD" at 26.25,12.625 h1 r90
  text "RXD" at 28.85,12.625 h1 r90
  text "3V3" at 6.005,11.45 h1 r90
  text "RST" at 8.545,11.45 h1 r90
  text "SWD" at 11.085,11.45 h1 r90
  text "SCL" at 13.625,11.45 h1 r90
  text "GND" at 16.165,11.45 h1 r90
Mechanical 3:
  the board outline again, w0.254
Drill Drawing:
  drawing of 219 lines, arcs and shapes, not listed
  text "Layer" at 66.938,39.144 h1.52
  text "Name" at 77.35,39.144 h1.52
  text "Material" at 100.966,39.144 h1.52
  text "Thickness" at 122.804,39.144 h1.52
  text "Constant" at 139.309,39.144 h1.52
  text "Board Layer Stack" at 153.784,39.144 h1.52
  text "1" at 66.938,36.096 h1.52
  text "Top Overlay" at 77.35,36.096 h1.52
  text "2" at 66.938,33.048 h1.52
  text "Top Solder" at 77.35,33.048 h1.52
  text "Solder Resist" at 100.966,33.048 h1.52
  text "0.010mm" at 122.804,33.048 h1.52
  text "3.5" at 139.309,33.048 h1.52
  text "3" at 66.938,30 h1.52
  text "Top Layer" at 77.35,30 h1.52
  text "Copper" at 100.966,30 h1.52
  text "0.036mm" at 122.804,30 h1.52
  text "4" at 66.938,26.952 h1.52
  text "Dielectric 1" at 77.35,26.952 h1.52
  text "FR-4" at 100.966,26.952 h1.52
  text "0.320mm" at 122.804,26.952 h1.52
  text "4.8" at 139.309,26.952 h1.52
  text "5" at 66.938,23.904 h1.52
  text "Bottom Layer" at 77.35,23.904 h1.52
  text "Copper" at 100.966,23.904 h1.52
  text "0.036mm" at 122.804,23.904 h1.52
  text "6" at 66.938,20.856 h1.52
  text "Bottom Solder" at 77.35,20.856 h1.52
  text "Solder Resist" at 100.966,20.856 h1.52
  text "0.010mm" at 122.804,20.856 h1.52
  text "3.5" at 139.309,20.856 h1.52
  text "7" at 66.938,17.808 h1.52
  text "Bottom Overlay" at 77.35,17.808 h1.52
  text "Symbol" at 67.717,7.4 h1.83
  text "Count" at 80.566,7.4 h1.83
  text "Hole Size" at 94.279,7.4 h1.83
  text "Plated" at 112.613,7.4 h1.83
  text "Hole Type" at 125.462,7.4 h1.83
  text "Drill Layer Pair" at 144.101,7.4 h1.83
  text "Via/Pad" at 182.189,7.4 h1.83
  text "4" at 80.566,3.59 h1.52
  text "3.000mm" at 94.279,3.59 h1.52
  text "PTH" at 112.613,3.59 h1.52
  text "Round" at 125.462,3.59 h1.52
  text "Top Layer - Bottom Layer" at 144.101,3.59 h1.52
  text "Pad" at 182.189,3.59 h1.52
  text "8" at 80.566,-0.22 h1.52
  text "0.800mm" at 94.279,-0.22 h1.52
  text "PTH" at 112.613,-0.22 h1.52
  text "Round" at 125.462,-0.22 h1.52
  text "Top Layer - Bottom Layer" at 144.101,-0.22 h1.52
  text "Pad" at 182.189,-0.22 h1.52
  text "64" at 80.566,-4.03 h1.52
  text "0.400mm" at 94.279,-4.03 h1.52
  text "PTH" at 112.613,-4.03 h1.52
  text "Round" at 125.462,-4.03 h1.52
  text "Top Layer - Bottom Layer" at 144.101,-4.03 h1.52
  text "Via" at 182.189,-4.03 h1.52
  text "76 Total" at 80.566,-7.84 h1.52

## Dimensions
50.075,1 to -4.727,1 on Drill Drawing
45.348,-3.727 to 45.348,22.402 on Drill Drawing